# Altium PCB 3 Phase NPC Inverter.PcbDoc (part 2 of 2)
Units mm, origin at the board's own origin, x right, y up, seen from the top; angles counter-clockwise.
Board outline 302.85 x 157.72 mm, 6 copper layers (Top Layer, Reg_10_Pos, Pulse_Pos, Pulse_Neg, Reg_10_GND, Bottom Layer), stack 0.816 mm thick; 134 components, 89 nets, 487 pads, 1180 vias.
Unrouted connection lines stored in the file: 6.
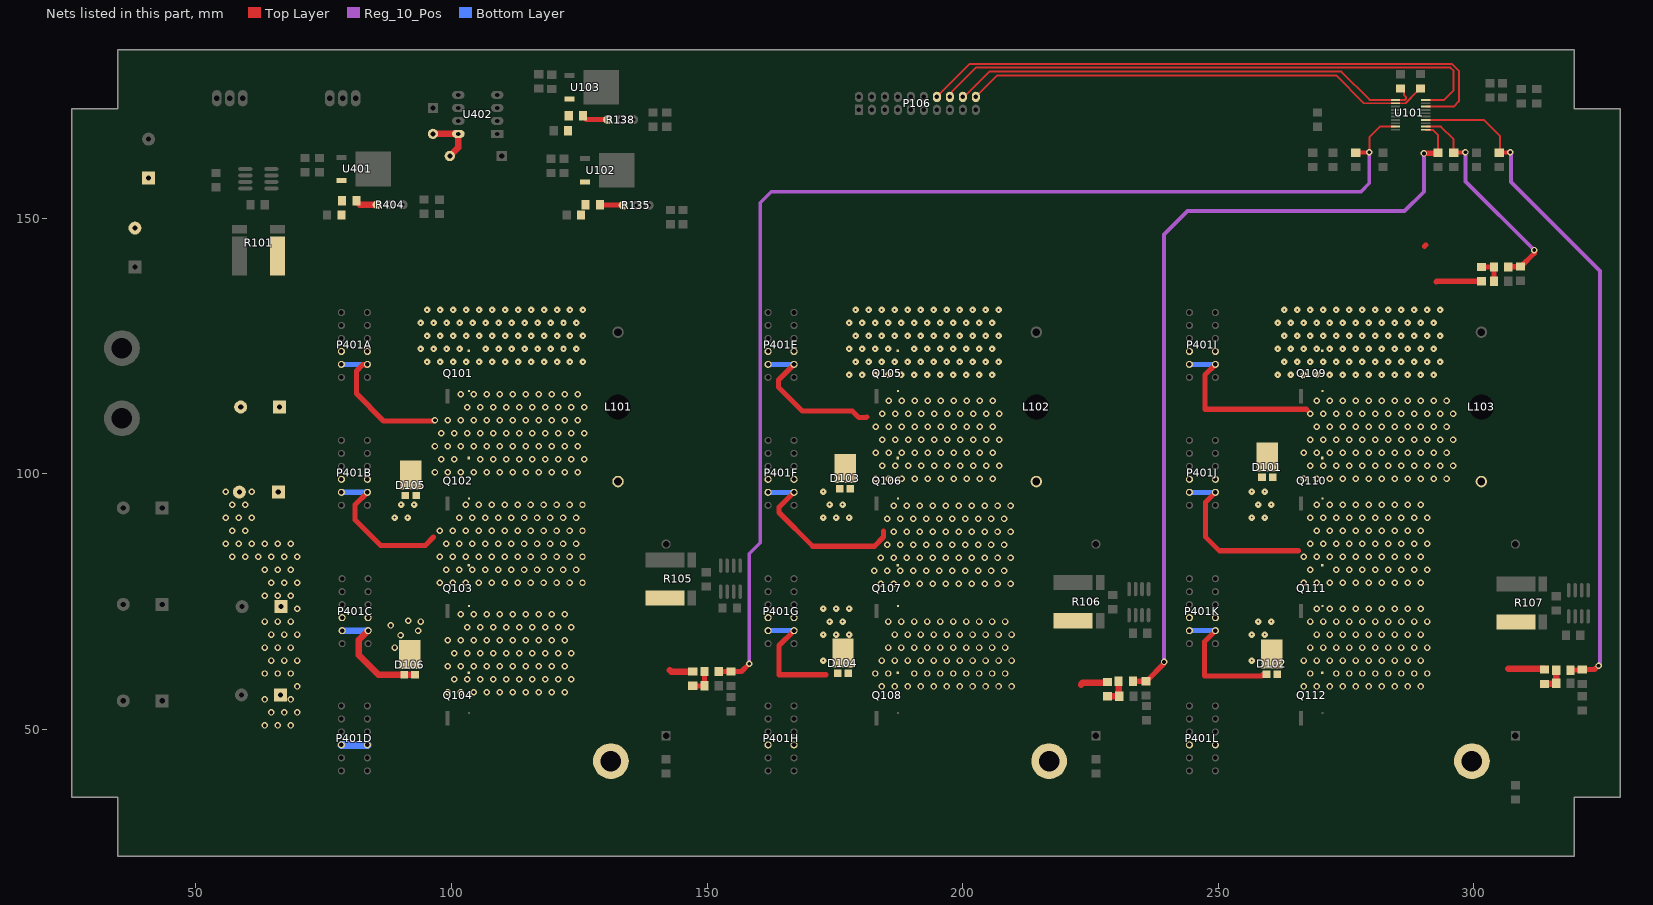
[diagram p6: the nets of this part, all layers, seen from the top]

## Via types
v1: diameter 1.27, hole 0.711, Top Layer to Bottom Layer, 888 vias
v2: diameter 1.27, hole 0.381, Top Layer to Bottom Layer, 258 vias
v3: diameter 1.27, hole 0.762, Top Layer to Bottom Layer, 30 vias
v4: diameter 5, hole 3, Top Layer to Bottom Layer, 4 vias

## Nets (pads, with @x,y where several pads share a name; then routed paths per layer and width w, separated by ;. In a path a pad name is that pad's centre, name@x,y a point inside that pad or via, vN(x,y) a via of type N, cw(c..) or ccw(c..) an arc to the next point about the centre after c; other vN are vias at no path point) (continued)
NetC129_1: C129.1 C130.1 Q101.3 Q105.3 Q109.3 R101.4 R102.2 | length 9.3
  Top Layer w1.016: 290.322,144.526 290.576,144.78 ; 292.608,137.541 292.735,137.668 R102.2@301.498,137.668
  other v2: 177.8,119.38 180.34,119.38 182.88,119.38 185.42,119.38 187.96,119.38 190.5,119.38 193.04,119.38 195.58,119.38 198.12,119.38 200.66,119.38 203.2,119.38 205.74,119.38 261.62,119.38 264.16,119.38 266.7,119.38 269.24,119.38 271.78,119.38 274.32,119.38 276.86,119.38 279.4,119.38 281.94,119.38 284.48,119.38 287.02,119.38 289.56,119.38 292.1,119.38 95.25,121.92 97.79,121.92 100.33,121.92 102.87,121.92 105.41,121.92 107.95,121.92 110.49,121.92 113.03,121.92 115.57,121.92 118.11,121.92 120.65,121.92 123.19,121.92 125.73,121.92 179.07,121.92 181.61,121.92 184.15,121.92 186.69,121.92 189.23,121.92 191.77,121.92 194.31,121.92 196.85,121.92 199.39,121.92 201.93,121.92 204.47,121.92 207.01,121.92 262.89,121.92 265.43,121.92 267.97,121.92 270.51,121.92 273.05,121.92 275.59,121.92 278.13,121.92 280.67,121.92 283.21,121.92 285.75,121.92 288.29,121.92 290.83,121.92 293.37,121.92 93.98,124.46 96.52,124.46 99.06,124.46 101.6,124.46 106.68,124.46 109.22,124.46 111.76,124.46 114.3,124.46 116.84,124.46 119.38,124.46 121.92,124.46 124.46,124.46 177.8,124.46 180.34,124.46 182.88,124.46 185.42,124.46 190.5,124.46 193.04,124.46 195.58,124.46 198.12,124.46 200.66,124.46 203.2,124.46 205.74,124.46 261.62,124.46 264.16,124.46 266.7,124.46 269.24,124.46 271.78,124.46 274.32,124.46 276.86,124.46 279.4,124.46 281.94,124.46 284.48,124.46 287.02,124.46 289.56,124.46 292.1,124.46 95.25,127 97.79,127 100.33,127 102.87,127 105.41,127 107.95,127 110.49,127 113.03,127 115.57,127 118.11,127 120.65,127 123.19,127 125.73,127 179.07,127 181.61,127 184.15,127 186.69,127 189.23,127 191.77,127 194.31,127 196.85,127 199.39,127 201.93,127 204.47,127 207.01,127 262.89,127 265.43,127 267.97,127 270.51,127 273.05,127 275.59,127 278.13,127 280.67,127 283.21,127 285.75,127 288.29,127 290.83,127 293.37,127 93.98,129.54 96.52,129.54 99.06,129.54 101.6,129.54 104.14,129.54 106.68,129.54 109.22,129.54 111.76,129.54 114.3,129.54 116.84,129.54 119.38,129.54 121.92,129.54 124.46,129.54 177.8,129.54 180.34,129.54 182.88,129.54 185.42,129.54 187.96,129.54 190.5,129.54 193.04,129.54 195.58,129.54 198.12,129.54 200.66,129.54 203.2,129.54 205.74,129.54 261.62,129.54 264.16,129.54 266.7,129.54 269.24,129.54 271.78,129.54 274.32,129.54 276.86,129.54 279.4,129.54 281.94,129.54 284.48,129.54 287.02,129.54 289.56,129.54 292.1,129.54 95.25,132.08 97.79,132.08 100.33,132.08 102.87,132.08 105.41,132.08 107.95,132.08 110.49,132.08 113.03,132.08 115.57,132.08 118.11,132.08 120.65,132.08 123.19,132.08 125.73,132.08 179.07,132.08 181.61,132.08 184.15,132.08 186.69,132.08 189.23,132.08 191.77,132.08 194.31,132.08 196.85,132.08 199.39,132.08 201.93,132.08 204.47,132.08 207.01,132.08 262.89,132.08 265.43,132.08 267.97,132.08 270.51,132.08 273.05,132.08 275.59,132.08 278.13,132.08 280.67,132.08 283.21,132.08 285.75,132.08 288.29,132.08 290.83,132.08 293.37,132.08
NetC129_2: C129.2 C130.2 C131.1 C132.1 D101.1 D101.2 D102.3 D103.1 D103.2 D104.3 D105.1 D105.2 D106.3
  other v1: 63.5,50.8 63.5,50.8 63.5,50.8 63.5,50.8 66.04,50.8 66.04,50.8 66.04,50.8 66.04,50.8 68.58,50.8 68.58,50.8 68.58,50.8 68.58,50.8 64.77,53.34 64.77,53.34 64.77,53.34 64.77,53.34 67.31,53.34 67.31,53.34 67.31,53.34 67.31,53.34 69.85,53.34 69.85,53.34 69.85,53.34 69.85,53.34 63.5,55.88 63.5,55.88 63.5,55.88 63.5,55.88 68.58,55.88 68.58,55.88 68.58,55.88 68.58,55.88 69.85,58.42 69.85,58.42 69.85,58.42 69.85,58.42 63.5,60.96 63.5,60.96 63.5,60.96 63.5,60.96 66.04,60.96 66.04,60.96 66.04,60.96 66.04,60.96 68.58,60.96 68.58,60.96 68.58,60.96 68.58,60.96 64.77,63.5 64.77,63.5 64.77,63.5 64.77,63.5 67.31,63.5 67.31,63.5 67.31,63.5 67.31,63.5 69.85,63.5 69.85,63.5 69.85,63.5 69.85,63.5 63.5,66.04 63.5,66.04 63.5,66.04 63.5,66.04 66.04,66.04 66.04,66.04 66.04,66.04 66.04,66.04 68.58,66.04 68.58,66.04 68.58,66.04 68.58,66.04 88.9,66.04 88.9,66.04 88.9,66.04 88.9,66.04 90.045,68.455 90.045,68.455 90.045,68.455 90.045,68.455 64.77,68.58 64.77,68.58 64.77,68.58 64.77,68.58 67.31,68.58 67.31,68.58 67.31,68.58 67.31,68.58 69.85,68.58 69.85,68.58 69.85,68.58 69.85,68.58 93.47,69.34 93.47,69.34 93.47,69.34 93.47,69.34 88.14,70.36 88.14,70.36 88.14,70.36 88.14,70.36 63.5,71.12 63.5,71.12 63.5,71.12 63.5,71.12 66.04,71.12 66.04,71.12 66.04,71.12 66.04,71.12 68.58,71.12 68.58,71.12 68.58,71.12 68.58,71.12 93.98,71.12 93.98,71.12 93.98,71.12 91.565,71.245 91.565,71.245 91.565,71.245 91.565,71.245 69.85,73.66 69.85,73.66 69.85,73.66 69.85,73.66 63.5,76.2 63.5,76.2 63.5,76.2 63.5,76.2 66.04,76.2 66.04,76.2 66.04,76.2 66.04,76.2 68.58,76.2 68.58,76.2 68.58,76.2 68.58,76.2 64.77,78.74 64.77,78.74 64.77,78.74 64.77,78.74 67.31,78.74 67.31,78.74 67.31,78.74 67.31,78.74 69.85,78.74 69.85,78.74 69.85,78.74 69.85,78.74 63.5,81.28 63.5,81.28 63.5,81.28 63.5,81.28 66.04,81.28 66.04,81.28 66.04,81.28 66.04,81.28 68.58,81.28 68.58,81.28 68.58,81.28 68.58,81.28 57.15,83.82 57.15,83.82 57.15,83.82 57.15,83.82 59.69,83.82 59.69,83.82 59.69,83.82 59.69,83.82 62.23,83.82 62.23,83.82 62.23,83.82 62.23,83.82 64.77,83.82 64.77,83.82 64.77,83.82 64.77,83.82 67.31,83.82 67.31,83.82 67.31,83.82 67.31,83.82 69.85,83.82 69.85,83.82 69.85,83.82 69.85,83.82 55.88,86.36 55.88,86.36 55.88,86.36 55.88,86.36 58.42,86.36 58.42,86.36 58.42,86.36 58.42,86.36 60.96,86.36 60.96,86.36 60.96,86.36 60.96,86.36 63.5,86.36 63.5,86.36 63.5,86.36 63.5,86.36 66.04,86.36 66.04,86.36 66.04,86.36 66.04,86.36 68.58,86.36 68.58,86.36 68.58,86.36 68.58,86.36 57.15,88.9 57.15,88.9 57.15,88.9 57.15,88.9 59.69,88.9 59.69,88.9 59.69,88.9 59.69,88.9 55.88,91.44 55.88,91.44 55.88,91.44 55.88,91.44 58.42,91.44 58.42,91.44 58.42,91.44 58.42,91.44 60.96,91.44 60.96,91.44 60.96,91.44 60.96,91.44 57.15,93.98 57.15,93.98 57.15,93.98 57.15,93.98 59.69,93.98 59.69,93.98 59.69,93.98 59.69,93.98 55.88,96.52 55.88,96.52 55.88,96.52 55.88,96.52 60.96,96.52 60.96,96.52 60.96,96.52 60.96,96.52
  other v2: 172.72,63.5 256.54,63.5 172.72,68.58 175.26,68.58 177.8,68.58 256.54,68.58 259.08,68.58 173.99,71.12 176.53,71.12 257.81,71.12 260.35,71.12 172.72,73.66 175.26,73.66 177.8,73.66 88.9,91.44 91.44,91.44 172.72,91.44 175.26,91.44 177.8,91.44 256.54,91.44 259.08,91.44 90.17,93.98 92.71,93.98 173.99,93.98 176.53,93.98 257.81,93.98 260.35,93.98 172.72,96.52 256.54,96.52 259.08,96.52
NetC405_2: C405.2 D401.K U402.8 | length 10
  Top Layer w1.27: C405.2@96.393,166.497 U402.8@101.346,166.497 101.346,163.83 D401.K@99.695,162.179
NetC406_2: C406.2 C407.1 P401A.3 P401B.3 P401C.3 P401D.3 P401E.3 P401F.3 P401G.3 P401H.3 P401I.3 P401J.3 P401K.3 P401L.3 | length 5.1
  Bottom Layer w1.524: P401D.3@78.486,46.99 P401D.3@83.566,46.99
NetP103_1: P103.1 R105.4 R112.2 | length 4.7
  Top Layer w1.27: 142.748,61.595 142.996,61.347 R112.2@147.314,61.347
NetP104_1: P104.1 R106.4 R115.2 | length 5.5
  Top Layer w1.27: 223.139,58.801 223.52,59.182 228.346,59.182 R115.2@228.346,59.315
NetP105_1: P105.1 R107.4 R118.2 | length 7.2
  Top Layer w1.27: 306.705,61.849 313.696,61.849 R118.2@313.817,61.728
NetR102_1: R102.1 R103.2 R104.2 | length 5.2
  Top Layer w1.016: R102.1@301.498,140.468 301.501,140.465 303.902,140.465 303.908,140.459 303.908,137.671 R104.2@303.911,137.668
NetR112_1: R112.1 R113.2 R114.2 | length 5.1
  Top Layer w1: R112.1@147.192,58.547 R113.2@149.478,58.547 R114.2@149.478,61.341
NetR115_1: R115.1 R116.2 R117.2 | length 5.3
  Top Layer w1.27: R115.1@228.346,56.515 R116.2@230.626,56.515 230.563,56.578 230.563,59.372 R117.2@230.499,59.436
NetR118_1: R118.1 R119.2 R120.2 | length 4.9
  Top Layer w1.27: R118.1@313.817,58.928 313.88,58.991 316.034,58.991 R119.2@316.097,59.055 R120.2@316.097,61.595
NetR133_2: R133.2 R134.2 U102.3
NetR134_1: R134.1 R135.1 | length 4.6
  Top Layer w1: R134.1@129.032,152.654 129.095,152.59 133.413,152.59 133.477,152.527 R135.1@133.604,152.527
NetR136_2: R136.2 R137.2 U103.3
NetR137_1: R137.1 R138.1 | length 5.2
  Top Layer w1: R137.1@125.736,170.053 125.736,169.953 126.398,169.291 R138.1@130.556,169.291
NetR402_2: R402.2 R403.2 U401.3
NetR403_1: R403.1 R404.1 | length 4.4
  Top Layer w1.27: R403.1@81.407,153.416 81.407,153.316 82.069,152.654 R404.1@85.471,152.654
SPI2(ADC)-MISO: P106.14 U101.18 | length 118.6
  Top Layer w0.381: P106.14@194.668,173.459 201.422,180.213 295.656,180.213 297.053,178.816 297.053,172.847 296.052,171.846 U101.18@290.576,171.846
SPI2(ADC)-MOSI: P106.20 R132.1 U101.2 | length 92.2
  Top Layer w0.381: P106.20@202.565,173.736 206.756,177.927 273.05,177.927 278.481,172.496 U101.2@284.683,172.496 286.607,172.496 288.85,174.739 288.85,174.777 289.46,175.387 R132.1@289.56,175.387
SPI2(ADC)-NCS: P106.18 R131.1 U101.1@284.683,173.146 | length 93.8
  Top Layer w0.381: P106.18@199.884,173.369 205.204,178.689 274.066,178.689 279.609,173.146 U101.1@284.683,173.146 286.467,173.146 286.69,173.369 286.69,173.75 286.333,174.108 286.333,174.65 285.723,175.26 R131.1@285.623,175.26
SPI2(ADC)-SCK: P106.16 U101.20 | length 111.6
  Top Layer w0.381: P106.16@197.485,173.736 197.485,174.288 197.862,174.664 197.862,174.748 202.565,179.451 295.402,179.451 296.037,178.816 296.037,175.006 294.177,173.146 U101.20@290.576,173.146
VS1: D105.3 P401A.2 Q101.2 Q102.3 | length 29.3
  Top Layer w1.016: P401A.2@83.566,121.412 83.493,121.339 82.604,121.339 81.407,120.142 81.407,115.697 86.741,110.363 v1@96.266,110.363
  Bottom Layer w1.016: P401A.2@78.486,121.412 P401A.2@83.566,121.412
  other v1: 96.774,100.33 99.314,100.33 101.854,100.33 104.394,100.33 106.934,100.33 109.474,100.33 112.014,100.33 114.554,100.33 117.094,100.33 119.634,100.33 122.174,100.33 124.714,100.33 98.044,102.87 100.584,102.87 105.664,102.87 108.204,102.87 110.744,102.87 113.284,102.87 115.824,102.87 118.364,102.87 120.904,102.87 123.444,102.87 125.984,102.87 96.774,105.41 99.314,105.41 101.854,105.41 104.394,105.41 106.934,105.41 109.474,105.41 112.014,105.41 114.554,105.41 117.094,105.41 119.634,105.41 122.174,105.41 124.714,105.41 98.044,107.95 100.584,107.95 103.124,107.95 105.664,107.95 108.204,107.95 110.744,107.95 113.284,107.95 115.824,107.95 118.364,107.95 120.904,107.95 123.444,107.95 125.984,107.95 96.774,110.49 99.314,110.49 101.854,110.49 104.394,110.49 106.934,110.49 109.474,110.49 112.014,110.49 114.554,110.49 117.094,110.49 119.634,110.49 122.174,110.49 124.714,110.49 103.124,113.03 105.664,113.03 108.204,113.03 110.744,113.03 113.284,113.03 115.824,113.03 118.364,113.03 120.904,113.03 123.444,113.03 125.984,113.03 101.854,115.57 104.394,115.57 106.934,115.57 109.474,115.57 112.014,115.57 114.554,115.57 117.094,115.57 119.634,115.57 122.174,115.57 124.714,115.57
VS2: L101.1 P401B.2 Q102.2 Q103.3 | length 29.6
  Top Layer w1.016: P401B.2@83.566,96.393 81.129,93.956 81.129,91.023 86.166,85.987 94.877,85.987 96.52,87.63
  Bottom Layer w1.016: P401B.2@78.486,96.393 P401B.2@83.566,96.393
  other v1: 97.696,78.707 100.236,78.707 102.776,78.707 105.316,78.707 107.856,78.707 110.396,78.707 112.936,78.707 115.476,78.707 118.016,78.707 120.556,78.707 123.096,78.707 125.636,78.707 98.966,81.247 101.506,81.247 104.046,81.247 106.586,81.247 109.126,81.247 111.666,81.247 114.206,81.247 116.746,81.247 119.286,81.247 121.826,81.247 124.366,81.247 97.696,83.787 100.236,83.787 102.776,83.787 105.316,83.787 107.856,83.787 110.396,83.787 112.936,83.787 115.476,83.787 118.016,83.787 120.556,83.787 123.096,83.787 125.636,83.787 98.966,86.327 101.506,86.327 104.046,86.327 106.586,86.327 109.126,86.327 111.666,86.327 114.206,86.327 116.746,86.327 119.286,86.327 121.826,86.327 124.366,86.327 97.696,88.867 100.236,88.867 102.776,88.867 105.316,88.867 107.856,88.867 110.396,88.867 112.936,88.867 115.476,88.867 118.016,88.867 120.556,88.867 123.096,88.867 125.636,88.867 101.506,91.407 104.046,91.407 106.586,91.407 109.126,91.407 111.666,91.407 114.206,91.407 116.746,91.407 119.286,91.407 121.826,91.407 124.366,91.407 102.776,93.947 105.316,93.947 107.856,93.947 110.396,93.947 112.936,93.947 115.476,93.947 118.016,93.947 120.556,93.947 123.096,93.947 125.636,93.947
VS3: D106.1 D106.2 P401C.2 Q103.2 Q104.3 | length 23.2
  Top Layer w1.27: P401C.2@83.693,69.342 81.915,67.564 81.915,64.516 85.725,60.706 92.075,60.706 92.088,60.719 D106.1@92.871,60.719
  Bottom Layer w1.27: P401C.2@78.613,69.342 P401C.2@83.693,69.342
  other v1: 99.314,57.324 101.854,57.324 104.394,57.324 106.934,57.324 109.474,57.324 112.014,57.324 114.554,57.324 117.094,57.324 119.634,57.324 122.174,57.324 100.584,59.864 103.124,59.864 105.664,59.864 108.204,59.864 110.744,59.864 113.284,59.864 115.824,59.864 118.364,59.864 120.904,59.864 123.444,59.864 99.314,62.404 101.854,62.404 104.394,62.404 106.934,62.404 109.474,62.404 112.014,62.404 114.554,62.404 117.094,62.404 119.634,62.404 122.174,62.404 100.584,64.944 103.124,64.944 105.664,64.944 108.204,64.944 110.744,64.944 113.284,64.944 115.824,64.944 118.364,64.944 120.904,64.944 123.444,64.944 99.314,67.484 101.854,67.484 104.394,67.484 106.934,67.484 109.474,67.484 112.014,67.484 114.554,67.484 117.094,67.484 119.634,67.484 122.174,67.484 103.124,70.024 105.664,70.024 108.204,70.024 110.744,70.024 113.284,70.024 115.824,70.024 118.364,70.024 120.904,70.024 123.444,70.024 101.854,72.564 104.394,72.564 106.934,72.564 109.474,72.564 112.014,72.564 114.554,72.564 117.094,72.564 119.634,72.564 122.174,72.564
VS5: D103.3 P401E.2 Q105.2 Q106.3 | length 30.6
  Top Layer w1: P401E.2@167.005,121.412 163.957,118.364 163.957,116.967 168.656,112.268 178.435,112.268 179.705,110.998 181.102,110.998 181.229,111.125
  Bottom Layer w1: P401E.2@161.925,121.412 P401E.2@167.005,121.412
  other v1: 183.007,99.064 185.547,99.064 188.087,99.064 190.627,99.064 193.167,99.064 195.707,99.064 198.247,99.064 200.787,99.064 203.327,99.064 205.867,99.064 184.277,101.604 186.817,101.604 189.357,101.604 191.897,101.604 194.437,101.604 196.977,101.604 199.517,101.604 202.057,101.604 204.597,101.604 207.137,101.604 183.007,104.144 185.547,104.144 188.087,104.144 190.627,104.144 193.167,104.144 195.707,104.144 198.247,104.144 200.787,104.144 203.327,104.144 205.867,104.144 184.277,106.684 186.817,106.684 189.357,106.684 191.897,106.684 194.437,106.684 196.977,106.684 199.517,106.684 202.057,106.684 204.597,106.684 207.137,106.684 183.007,109.224 185.547,109.224 188.087,109.224 190.627,109.224 193.167,109.224 195.707,109.224 198.247,109.224 200.787,109.224 203.327,109.224 205.867,109.224 184.277,111.764 186.817,111.764 189.357,111.764 191.897,111.764 194.437,111.764 196.977,111.764 199.517,111.764 202.057,111.764 204.597,111.764 207.137,111.764 185.547,114.304 188.087,114.304 190.627,114.304 193.167,114.304 195.707,114.304 198.247,114.304 200.787,114.304 203.327,114.304 205.867,114.304
VS6: L102.1 P401F.2 Q106.2 Q107.3 | length 35.3
  Top Layer w1: P401F.2@167.005,96.393 164.084,93.472 164.084,92.456 170.68,85.86 182.733,85.86 184.531,87.658 184.531,88.773
  Bottom Layer w1: P401F.2@161.925,96.393 P401F.2@167.005,96.393
  other v1: 183.958,78.548 186.498,78.548 189.038,78.548 191.578,78.548 194.118,78.548 196.658,78.548 199.198,78.548 201.738,78.548 204.278,78.548 206.818,78.548 209.358,78.548 182.688,81.088 185.228,81.088 187.768,81.088 190.308,81.088 192.848,81.088 195.388,81.088 197.928,81.088 200.468,81.088 203.008,81.088 205.548,81.088 208.088,81.088 183.958,83.628 186.498,83.628 189.038,83.628 191.578,83.628 194.118,83.628 196.658,83.628 199.198,83.628 201.738,83.628 204.278,83.628 206.818,83.628 209.358,83.628 185.228,86.168 187.768,86.168 190.308,86.168 192.848,86.168 195.388,86.168 197.928,86.168 200.468,86.168 203.008,86.168 205.548,86.168 208.088,86.168 186.498,88.708 189.038,88.708 191.578,88.708 194.118,88.708 196.658,88.708 199.198,88.708 201.738,88.708 204.278,88.708 206.818,88.708 209.358,88.708 185.228,91.248 187.768,91.248 190.308,91.248 192.848,91.248 195.388,91.248 197.928,91.248 200.468,91.248 203.008,91.248 205.548,91.248 208.088,91.248 186.498,93.788 189.038,93.788 191.578,93.788 194.118,93.788 196.658,93.788 199.198,93.788 201.738,93.788 204.278,93.788 206.818,93.788 209.358,93.788
VS7: D104.1 D104.2 P401G.2 Q107.2 Q108.3 | length 24.1
  Top Layer w1: P401G.2@167.005,69.342 164.084,66.421 164.084,60.706 173.228,60.706
  Bottom Layer w1: P401G.2@161.925,69.342 P401G.2@167.005,69.342
  other v1: 184.15,58.42 186.69,58.42 189.23,58.42 191.77,58.42 194.31,58.42 196.85,58.42 199.39,58.42 201.93,58.42 204.47,58.42 207.01,58.42 209.55,58.42 182.88,60.96 185.42,60.96 190.5,60.96 193.04,60.96 195.58,60.96 198.12,60.96 200.66,60.96 203.2,60.96 205.74,60.96 208.28,60.96 184.15,63.5 186.69,63.5 189.23,63.5 191.77,63.5 194.31,63.5 196.85,63.5 199.39,63.5 201.93,63.5 204.47,63.5 207.01,63.5 209.55,63.5 185.42,66.04 187.96,66.04 190.5,66.04 193.04,66.04 195.58,66.04 198.12,66.04 200.66,66.04 203.2,66.04 205.74,66.04 208.28,66.04 186.69,68.58 189.23,68.58 191.77,68.58 194.31,68.58 196.85,68.58 199.39,68.58 201.93,68.58 204.47,68.58 207.01,68.58 209.55,68.58 185.42,71.12 187.96,71.12 190.5,71.12 193.04,71.12 195.58,71.12 198.12,71.12 200.66,71.12 203.2,71.12 205.74,71.12 208.28,71.12
VS9: D101.3 P401I.2 Q109.2 Q110.3 | length 34.7
  Top Layer w1: P401I.2@249.428,121.412 247.396,119.38 247.396,112.649 267.208,112.649 267.335,112.522
  Bottom Layer w1.016: P401I.2@244.348,121.412 P401I.2@249.428,121.412
  other v1: 266.7,99.06 269.24,99.06 271.78,99.06 274.32,99.06 276.86,99.06 279.4,99.06 281.94,99.06 284.48,99.06 287.02,99.06 289.56,99.06 292.1,99.06 294.64,99.06 267.97,101.6 270.51,101.6 273.05,101.6 275.59,101.6 278.13,101.6 280.67,101.6 283.21,101.6 285.75,101.6 288.29,101.6 290.83,101.6 293.37,101.6 295.91,101.6 266.7,104.14 269.24,104.14 271.78,104.14 274.32,104.14 276.86,104.14 279.4,104.14 281.94,104.14 284.48,104.14 287.02,104.14 289.56,104.14 292.1,104.14 294.64,104.14 267.97,106.68 270.51,106.68 273.05,106.68 275.59,106.68 278.13,106.68 280.67,106.68 283.21,106.68 285.75,106.68 288.29,106.68 290.83,106.68 293.37,106.68 295.91,106.68 269.24,109.22 271.78,109.22 274.32,109.22 276.86,109.22 279.4,109.22 281.94,109.22 284.48,109.22 287.02,109.22 289.56,109.22 292.1,109.22 294.64,109.22 267.97,111.76 270.51,111.76 273.05,111.76 275.59,111.76 278.13,111.76 280.67,111.76 283.21,111.76 285.75,111.76 288.29,111.76 290.83,111.76 293.37,111.76 295.91,111.76 269.24,114.3 271.78,114.3 274.32,114.3 276.86,114.3 279.4,114.3 281.94,114.3 284.48,114.3 287.02,114.3 289.56,114.3 292.1,114.3 294.64,114.3
VS10: L103.1 P401J.2 Q110.2 Q111.3 | length 33.9
  Top Layer w1: P401J.2@249.428,96.393 247.523,94.488 247.523,87.63 250.19,84.963 265.684,84.963
  Bottom Layer w1: P401J.2@244.348,96.393 P401J.2@249.428,96.393
  other v1: 266.7,78.74 269.24,78.74 271.78,78.74 274.32,78.74 276.86,78.74 279.4,78.74 281.94,78.74 284.48,78.74 287.02,78.74 289.56,78.74 267.97,81.28 273.05,81.28 275.59,81.28 278.13,81.28 280.67,81.28 283.21,81.28 285.75,81.28 288.29,81.28 290.83,81.28 266.7,83.82 269.24,83.82 271.78,83.82 274.32,83.82 276.86,83.82 279.4,83.82 281.94,83.82 284.48,83.82 287.02,83.82 289.56,83.82 267.97,86.36 270.51,86.36 273.05,86.36 275.59,86.36 278.13,86.36 280.67,86.36 283.21,86.36 285.75,86.36 288.29,86.36 290.83,86.36 269.24,88.9 271.78,88.9 274.32,88.9 276.86,88.9 279.4,88.9 281.94,88.9 284.48,88.9 287.02,88.9 289.56,88.9 267.97,91.44 270.51,91.44 273.05,91.44 275.59,91.44 278.13,91.44 280.67,91.44 283.21,91.44 285.75,91.44 288.29,91.44 290.83,91.44 269.24,93.98 271.78,93.98 274.32,93.98 276.86,93.98 279.4,93.98 281.94,93.98 284.48,93.98 287.02,93.98 289.56,93.98
VS11: D102.1 D102.2 P401K.2 Q111.2 Q112.3 | length 26.4
  Top Layer w1: P401K.2@249.428,69.342 247.269,67.183 247.269,60.452 258.398,60.452 258.665,60.719
  Bottom Layer w1: P401K.2@244.348,69.342 P401K.2@249.428,69.342
  other v1: 266.7,58.42 269.24,58.42 271.78,58.42 274.32,58.42 276.86,58.42 279.4,58.42 281.94,58.42 284.48,58.42 287.02,58.42 289.56,58.42 267.97,60.96 273.05,60.96 275.59,60.96 278.13,60.96 280.67,60.96 283.21,60.96 285.75,60.96 288.29,60.96 290.83,60.96 266.7,63.5 269.24,63.5 271.78,63.5 274.32,63.5 276.86,63.5 279.4,63.5 281.94,63.5 284.48,63.5 287.02,63.5 289.56,63.5 267.97,66.04 270.51,66.04 273.05,66.04 275.59,66.04 278.13,66.04 280.67,66.04 283.21,66.04 285.75,66.04 288.29,66.04 290.83,66.04 269.24,68.58 271.78,68.58 274.32,68.58 276.86,68.58 279.4,68.58 281.94,68.58 284.48,68.58 287.02,68.58 289.56,68.58 267.97,71.12 270.51,71.12 273.05,71.12 275.59,71.12 278.13,71.12 280.67,71.12 283.21,71.12 285.75,71.12 288.29,71.12 290.83,71.12 269.24,73.66 271.78,73.66 274.32,73.66 276.86,73.66 279.4,73.66 281.94,73.66 284.48,73.66 287.02,73.66 289.56,73.66
VS+1: C104.2 R103.1 R124.2 U101.12 | length 42.4
  Top Layer w0.381: U101.12@290.576,167.946 293.527,167.946 296.037,165.436 R124.2@296.037,162.814
  Top Layer w0.762: R124.2@296.037,162.814 296.082,162.859 298.278,162.859 v3(298.323,162.904)
  Top Layer w1.016: R103.1@306.705,140.462 306.768,140.525 309.054,140.525 C104.2@309.118,140.589 ; C104.2@308.991,140.589 C104.2@309.118,140.589 ; v3(311.785,143.764) 311.785,143.156 309.218,140.589 C104.2@309.118,140.589
  Reg_10_Pos w0.762: 298.323,162.249 298.323,157.226 v3(311.785,143.764)
VS+2: C108.2 R114.1 R126.2 U101.9 | length 235.9
  Top Layer w0.381: v3(279.527,162.904) 279.527,165.862 281.611,167.946 U101.9@284.683,167.946
  Top Layer w0.762: R126.2@276.86,162.814 276.905,162.859 279.482,162.859 v3(279.527,162.904)
  Top Layer w1.016: R114.1@152.278,61.341 C108.2@154.685,61.341 156.718,61.341 v3(158.242,62.865)
  Reg_10_Pos w0.762: v3(158.242,62.865) 158.242,84.384 160.401,86.543 160.401,153.035 162.56,155.194 277.876,155.194 279.527,156.845 v3@279.527,162.687
VS+3: C109.2 R117.1 R123.2 U101.11 | length 161.8
  Top Layer w0.381: U101.11@290.576,167.296 291.936,167.296 292.989,166.243 R123.2@292.989,162.814
  Top Layer w0.508: R117.1@233.299,59.436 R117.1@233.426,59.436
  Top Layer w1.016: R117.1@233.426,59.436 233.429,59.439 235.836,59.439 C109.2@235.839,59.442 235.939,59.442 239.395,62.898 v3(239.395,63.246) ; v3(290.195,162.687) 290.244,162.736 R123.2@292.784,162.736
  Reg_10_Pos w0.762: v3(239.395,63.246) 239.395,146.812 243.967,151.384 286.385,151.384 290.195,155.194 v3@290.195,162.404
VS+4: C110.2 R120.1 R128.2 U101.14 | length 134.2
  Top Layer w0.381: U101.14@290.576,169.246 301.924,169.246 305.054,166.116 305.054,162.941 R128.2@304.972,162.859
  Top Layer w0.762: R128.2@304.927,162.814 304.972,162.859 307.041,162.859 v3(307.086,162.904)
  Top Layer w1.016: R120.1@318.897,61.595 318.963,61.661 321.117,61.661 C110.2@321.183,61.728 323.602,61.728 v3(324.358,62.484)
  Reg_10_Pos w0.762: v3@307.213,162.306 307.213,157.099 324.612,139.7 324.612,62.875 324.358,62.621 v3(324.358,62.484)
pads on no net: L101.3 L102.3 L103.3 U101.1@284.048,174.031
copper on no net:
  other v4: 324.612,40.767 30.353,41.021 324.104,166.878 29.972,167.513

## Polygon pours and split planes (outlines as drawn)
VS1 on Top Layer "VS1_L01_P023" (solid, pour order 23): 89.916,102.705 89.916,97.026 94.101,97.079 94.101,97.536 101.219,97.536 101.219,102.362 101.69,102.833
NetC106_2 on Top Layer "Netc106_2" (solid, pour order 39): 211.938,130.62 211.938,119.635 232.791,119.635 232.791,83.694 225.626,83.694 225.626,75.566 217.551,75.566 217.551,85.853 218.059,85.853 218.059,119.635 232.791,119.635 232.791,130.498
VS10 on Top Layer "VS10" (solid, pour order 67): 298.704,102.87 298.704,96.266 290.957,96.266 290.957,89.789 305.435,89.789 305.435,102.87
NetC107_2 on Top Layer "107_2" (solid, pour order 62): 298.704,131.699 298.704,119.888 318.897,119.888 318.897,83.439 312.166,83.439 312.166,76.708 303.403,76.708 303.403,87.884 305.943,87.884 305.943,105.537 310.769,105.537 310.769,119.888 318.897,119.888 318.897,131.699
NetC129_2 on Top Layer "129_2" (solid, pour order 59): 253.746,74.422 253.746,61.849 262.636,61.849 262.832,74.422
VS11 on Top Layer "VS11" (solid, pour order 57): 264.541,55.499 257.556,55.499 257.556,61.595 264.541,61.595
NetC129_2 on Top Layer "129_2" (solid, pour order 50): 170.688,75.057 170.688,61.976 179.197,61.976 179.197,75.057
NetC129_2 on Top Layer "129_2" (solid, pour order 49): 253.746,100.076 253.746,88.773 262.509,88.773 262.509,100.076
VS9 on Top Layer "VS9" (solid, pour order 48): 256.667,106.172 256.667,100.584 265.176,100.584 265.176,106.172
VS6 on Top Layer "VS6" (solid, pour order 45): 209.296,100.686 209.296,89.027 217.043,89.027 217.043,100.686
VS7 on Top Layer "VS7" (solid, pour order 43): 181.356,55.245 181.356,61.722 172.974,61.722 172.974,55.245
VS6 on Top Layer "VS6_L01_P034" (solid, pour order 34): 183.769,95.941 183.769,85.979 181.61,85.979 181.61,75.438 215.646,75.438 215.646,96.09
NetC129_2 on Top Layer "NETC129_2_L01_P032" (solid, pour order 32): 170.561,89.535 179.324,89.535 179.324,97.79 179.197,97.917 170.561,97.917
VS5 on Top Layer "VS5_L01_P031" (solid, pour order 31): 174.752,103.759 174.625,103.632 174.625,98.298 181.356,98.298 181.356,103.759
+12 on Top Layer "NONET_L-01_P-001" (solid, pour order 70): 128.778,165.862 128.778,155.067 135.128,155.067 135.255,154.94 135.255,150.622 140.716,150.622 313.436,150.622 313.436,173.228 308.209,173.228 308.209,155.667 147.955,155.667 147.955,165.862 142.748,165.862
NetP105_1 on Top Layer "105_1" (solid, pour order 65): 298.831,72.644 312.039,72.644 312.039,69.596 312.039,53.096 305.562,53.096 305.562,39.243 305.308,38.989 294.513,38.989 294.513,72.644 298.831,72.644 312.039,72.644
NetR402_2 on Top Layer "NONET_L-01_P-001" (solid, pour order 82): 77.47,158.115 77.47,149.733 80.137,149.733 80.137,158.115
NetC129_1 on Top Layer "NETC129_1_L01_P001" (solid, pour order 1): 63.017,147.142 294.665,147.142 294.665,118.694 260.883,118.694 260.375,118.694 260.375,119.964 260.375,135.585 208.051,135.585 208.051,119.075 175.92,119.075 175.92,134.188 126.771,134.188 126.771,119.456 91.338,119.456 91.338,134.95 63.525,134.95 63.017,135.458
NetC129_2 on Top Layer "NETC129_2_L01_P021" (solid, pour order 21): 87.417,73.152 94.996,73.152 94.996,62.103 87.503,62.103 87.376,61.976
NetC105_2 on Top Layer "NETC105_2_L01_P016" (solid, pour order 16): 128.397,130.556 128.397,118.999 140.716,118.999 140.843,118.872 140.843,89.281 137.287,89.281 137.16,89.154 137.16,79.883 145.542,79.883 145.669,80.01 145.669,85.344 152.527,85.344 154.559,87.376 154.559,130.556
+10D on Top Layer "NONET_L-01_P-001" (solid, pour order 73): 81.153,163.703 81.153,155.194 86.868,155.194 86.995,155.067 86.995,150.749 92.456,150.749 92.456,152.273 111.379,152.273 111.379,152.654 111.379,167.64 105.918,167.64 105.918,160.401 106.045,160.274 95.123,160.274 95.123,163.703
+48 on Top Layer "NONET_L-01_P-001" (solid, pour order 72): 47.066,161.417 47.066,170.815 55.626,170.815 55.626,174.371 57.658,174.371 57.658,163.521 79.502,163.521 79.502,161.417
NetR133_2 on Top Layer "NONET_L-01_P-001" (solid, pour order 71): 124.333,158.115 124.333,149.606 127.254,149.606 127.254,158.115
+10 on Top Layer "NONET_L-01_P-001" (solid, pour order 69): 125.603,181.864 125.603,171.831 131.572,171.831 131.699,171.704 131.699,167.386 131.826,167.259 138.049,167.259 138.049,169.799 143.51,169.799 143.51,181.864
NetR136_2 on Top Layer "NONET_L-01_P-001" (solid, pour order 68): 121.539,174.117 121.539,165.608 124.46,165.608 124.46,174.117
+48 on Top Layer "+48_L01_P000" (solid, pour order 0): 30.063,117.706 42.382,117.706 42.382,48.641 44.056,48.641 52.161,48.641 52.161,131.422 53.304,132.565 61.559,132.565 61.559,146.535 48.387,146.762 48.387,177.267 111.826,177.192 111.826,160.782 127.254,160.782 127.254,162.84 115.54,162.84 115.552,177.187 124.206,177.265 124.206,181.864 42.926,181.864 42.926,148.232 30.063,134.551 30.063,128.12
VS11 on Top Layer "VS11" (solid, pour order 55): 266.827,75.692 266.827,64.516 264.541,64.516 264.541,55.499 291.719,55.499 291.719,75.692 291.592,75.692
VS10 on Top Layer "VS10" (solid, pour order 53): 266.827,96.393 266.827,85.471 264.16,85.471 264.16,76.454 291.973,76.454 291.973,96.393
VS9 on Top Layer "Vs9" (solid, pour order 47): 266.7,116.967 266.7,106.553 264.795,106.553 264.795,97.409 297.815,97.409 297.814,97.41 297.814,116.825
NetP104_1 on Top Layer "Netc104_1" (solid, pour order 41): 225.679,52.07 221.869,52.07 221.869,40.005 221.996,39.878 221.869,39.751 211.836,39.751 211.836,64.037 217.678,73.025 225.679,73.025
VS7 on Top Layer "VS7" (solid, pour order 36): 183.769,74.676 183.769,64.516 181.356,64.516 181.356,55.245 211.074,55.245 211.074,74.676
NetC129_2 on Top Layer "NETC129_2_L01_P026" (solid, pour order 26): 94.869,96.52 87.122,96.52 87.122,88.519 91.059,88.519 94.869,92.329
VS3 on Top Layer "VS3_L01_P024" (solid, pour order 24): 89.916,61.468 89.916,55.372 100.33,55.372 100.457,55.499 100.457,61.595
NetP103_1 on Top Layer "NETP103_1_L01_P017" (solid, pour order 17): 145.669,77.724 137.668,77.724 137.541,77.597 137.668,77.47 137.668,72.39 127.508,72.39 127.508,40.132 137.414,40.132 137.414,54.356 145.601,54.356 145.669,57.192
VS2 on Top Layer "VS2_L01_P013" (solid, pour order 13): 128.524,104.902 128.524,91.059 128.778,90.805 138.811,90.805 138.811,104.902
VS2 on Top Layer "VS2_L01_P009" (solid, pour order 9): 99.949,95.884 99.949,90.297 95.758,90.297 95.758,76.835 136.144,76.835 136.144,96.054
VS5 on Top Layer "VS5_L01_P012" (solid, pour order 12): 183.896,117.221 183.769,117.094 183.769,112.649 180.34,112.649 180.34,97.409 208.534,97.409 208.534,117.094 200.533,117.094 200.533,116.84 200.787,117.094 210.058,117.094
VS3 on Top Layer "VS3_L01_P010" (solid, pour order 10): 100.076,74.93 100.076,69.977 96.012,69.977 96.012,55.372 125.095,55.372 125.222,55.499 125.222,75.184
VS1 on Top Layer "VS1_L01_P005" (solid, pour order 5): 99.949,111.887 95.504,111.887 95.504,97.536 127.127,97.536 127.127,117.348 99.949,117.348
GND on Top Layer "GND_L01_P004" (solid, pour order 4): 41.106,110.109 28.374,110.109 28.374,44.069 36.322,44.069 36.322,26.035 277.929,26.035 277.929,39.497 277.929,54.102 267.261,54.102 267.261,39.243 193.474,39.243 193.22,39.497 193.22,54.229 184.076,54.229 183.949,54.102 183.949,38.989 108.765,38.989 108.765,53.848 100.129,53.848 100.002,53.721 100.002,38.735 72.697,38.735 72.443,38.989 72.443,47.296 60.831,47.386 61.075,77.662 55.055,77.662 55.055,47.296 40.641,47.296
NetC129_2 on Top Layer "NETC129_2_L01_P003" (solid, pour order 3): 62.103,121.412 53.975,121.412 53.975,80.645 61.722,80.645 61.722,48.133 71.755,48.133 71.755,48.514 71.755,49.149 71.755,87.376 62.357,87.376 62.23,87.503
NetC129_1 on Top Layer "NETC129_1_L01_P002" (solid, pour order 2): 63.246,134.874 63.119,134.747 63.119,88.519 72.644,88.519 72.771,88.519 72.771,135.001
NetC129_2 on Bottom Layer "NETC129_2_L06_P025" (solid, pour order 25): 171.141,106.008 171.141,37.428 170.252,36.539 73.605,36.539 73.605,26.633 73.478,26.506 262.962,26.506 262.962,32.645 262.958,32.645 262.962,108.802 262.454,109.31 262.073,108.929 254.199,108.929 254.199,37.428 179.777,37.428 179.777,105.627 179.396,106.008
VS5 on Bottom Layer "VS5_L06_P030" (solid, pour order 30): 183.896,117.221 183.769,117.094 183.769,112.649 204.089,112.649 208.534,117.094 208.534,97.536 180.467,97.536 180.34,97.409 180.34,112.649 204.089,112.649 208.534,117.094
VS6 on Bottom Layer "VS6" (solid, pour order 35): 183.896,95.631 183.896,85.725 183.769,85.598 181.61,85.598 181.61,75.438 210.947,75.438 210.947,95.758
NetC129_1 on Bottom Layer "NETC129_1_L06_P029" (solid, pour order 29): 176.149,133.604 176.149,118.491 208.28,118.491 208.28,133.477
+10 on Bottom Layer "NONET_L-01_P-001" (solid, pour order 79): 143.51,169.799 143.51,182.245 125.603,182.245 125.603,171.831 131.826,171.831 131.826,167.386 131.953,167.259 138.049,167.259 137.922,167.386 137.922,169.799 141.224,169.799
GND on Bottom Layer "NONET_L-01_P-001" (solid, pour order 76): 35.56,118.11 35.56,110.998 35.56,110.871 35.433,110.998 28.448,110.998 28.448,161.326 37.465,167.93 37.465,181.102 124.46,181.102 124.46,173.577 110.363,173.239 110.363,173.2 107.5,173.123 107.5,176.063 77.202,176.022 77.202,146.812 72.263,146.812 72.263,176.06 48.514,176.022 45.339,172.847 45.339,161.29 34.163,161.29 31.496,158.623 31.496,121.031
VS11 on Bottom Layer "VS11" (solid, pour order 56): 266.827,75.692 266.827,64.516 264.541,64.516 264.541,55.499 291.719,55.499 291.719,75.692
VS10 on Bottom Layer "VS10" (solid, pour order 54): 266.827,96.393 266.827,85.471 264.16,85.471 264.16,76.454 291.973,76.454 291.973,96.393
VS9 on Bottom Layer "VS9" (solid, pour order 52): 266.7,116.968 266.7,106.553 264.795,106.553 264.795,97.409 297.815,97.409 297.815,116.84
NetC129_1 on Bottom Layer "129_1" (solid, pour order 46): 260.604,135.001 260.604,118.11 294.894,118.11 294.894,134.874
VS7 on Bottom Layer "VS7" (solid, pour order 37): 183.931,74.676 183.769,74.514 183.769,64.516 181.356,64.516 181.356,55.245 211.074,55.245 211.074,74.676
NetC129_2 on Bottom Layer "NETC129_2_L06_P020" (solid, pour order 20): 62.23,98.933 53.975,98.933 53.975,80.899 54.229,80.645 61.341,80.645 61.341,26.543 74.549,26.543 74.549,81.534 74.93,81.915 87.376,81.915 87.376,62.611 87.884,62.103 94.869,62.103 94.869,96.139 94.234,96.774 87.122,96.774 87.122,91.948 74.803,91.948 74.803,88.773 74.93,88.646 74.422,88.138 62.357,88.138
VS3 on Bottom Layer "VS3_L06_P019" (solid, pour order 19): 99.949,74.93 99.949,70.104 99.822,69.977 96.012,69.977 96.012,55.372 125.222,55.372 125.222,75.184
VS2 on Bottom Layer "VS2_L06_P018" (solid, pour order 18): 99.949,95.885 99.949,90.297 95.758,90.297 95.758,76.835 127.508,76.835 127.508,96.012
NetC129_1 on Bottom Layer "NETC129_1_L06_P008" (solid, pour order 8): 91.567,118.872 126.873,118.872 126.873,133.985 126.746,134.112 91.44,134.112
VS1 on Bottom Layer "VS1_L06_P006" (solid, pour order 6): 99.949,117.348 99.949,111.887 95.504,111.887 95.504,97.536 127.127,97.536 127.127,117.348
VS11 on Bottom Paste "VS11" (solid): 266.827,75.692 266.827,64.516 264.541,64.516 264.541,55.499 291.719,55.499 291.719,75.692
VS10 on Bottom Paste "VS10" (solid): 266.827,96.393 266.827,85.471 264.16,85.471 264.16,76.454 292.1,76.454 292.1,96.393
VS9 on Bottom Paste "VS9" (solid): 266.7,116.967 266.7,106.553 264.795,106.553 264.795,97.409 297.815,97.409 297.815,116.84
NetC129_1 on Bottom Paste "129_1" (solid): 260.604,135.001 260.604,118.11 294.894,118.11 294.894,134.874
VS7 on Bottom Paste "VS7" (solid): 183.896,74.676 183.896,64.643 183.769,64.516 181.356,64.516 181.356,55.245 211.074,55.245 211.074,74.803
VS6 on Bottom Paste "VS6" (solid): 183.896,95.631 183.769,95.504 183.769,85.598 181.61,85.598 181.61,75.438 210.947,75.438 210.947,95.758
VS5 on Bottom Paste "VS5" (solid): 183.9,117.221 208.534,117.221 208.534,112.649 183.769,112.649
VS5 on Bottom Paste "VS5" (solid): 183.769,116.967 183.769,112.649 208.534,112.649 208.534,97.409 180.34,97.409 180.34,112.649 204.089,112.649 208.534,117.094 208.534,112.649
NetC129_1 on Bottom Paste "NetC129_1" (solid): 176.149,133.604 176.149,118.618 208.28,118.618 208.28,133.604
VS3 on Bottom Paste (solid): 99.949,74.93 99.949,69.977 96.012,69.977 96.012,55.372 125.222,55.372 125.222,75.184
VS2 on Bottom Paste (solid): 99.949,95.885 99.949,90.297 95.758,90.297 95.631,90.17 95.631,76.835 127.635,76.835 127.889,76.581 127.889,96.139
NetC129_1 on Bottom Paste (solid): 91.567,118.872 127,118.872 127,134.112 91.567,134.112
VS1 on Bottom Paste (solid): 99.949,117.348 99.949,111.887 95.377,111.887 95.377,97.663 95.504,97.536 127.127,97.536 127.127,117.348
VS11 on Bottom Solder "VS11" (solid): 266.827,75.692 266.827,64.516 264.541,64.516 264.541,55.499 291.719,55.499 291.719,75.692
VS10 on Bottom Solder "VS10" (solid): 266.827,96.393 266.827,85.471 266.7,85.344 264.16,85.344 264.16,76.581 264.287,76.454 292.1,76.454 292.1,96.266 291.973,96.393
VS9 on Bottom Solder "VS9" (solid): 266.7,116.967 266.7,106.553 264.795,106.553 264.795,97.409 297.815,97.409 297.815,116.84
NetC129_1 on Bottom Solder "129_1" (solid): 260.604,135.001 260.604,118.11 294.894,118.11 294.894,135.001
VS7 on Bottom Solder "VS7" (solid): 183.769,74.676 183.769,64.516 181.356,64.516 181.356,55.245 211.074,55.245 211.074,74.803
VS6 on Bottom Solder "VS6" (solid): 183.769,95.693 183.769,85.725 181.61,85.725 181.61,75.438 211.073,75.438 211.201,95.885
VS5 on Bottom Solder "VS5" (solid): 183.896,117.221 183.769,117.094 183.769,112.649 180.34,112.649 180.34,97.409 208.534,97.409 208.534,117.221
NetC129_1 on Bottom Solder "NetC129_1" (solid): 176.149,133.604 176.149,118.618 208.28,118.618 208.28,133.731
VS3 on Bottom Solder "VS3" (solid): 99.949,74.93 100.076,74.803 100.076,69.977 96.012,69.977 96.012,61.468 89.916,61.468 89.916,55.372 125.222,55.372 125.222,75.184
VS2 on Bottom Solder "VS2" (solid): 100.047,95.793 100.047,90.395 99.949,90.297 95.631,90.297 95.631,76.835 129.921,76.835 129.921,96.012
VS1 on Bottom Solder "VS1" (solid): 99.949,117.348 99.949,112.014 95.504,112.014 95.504,97.536 127.127,97.536 127.127,117.348
no net on Bottom Solder "VS5" (solid): 91.44,134.62 126.492,134.62 127,134.112 126.873,133.985 126.873,119.126 91.694,119.126 91.44,118.872
GND on Reg_10_GND "NONET_L-01_P-001" (solid, pour order 83): 36.068,110.871 41.783,110.871 41.91,110.998 50.419,110.998 67.564,128.143 67.564,175.895 266.319,175.895 266.319,180.213 48.26,180.213 48.26,128.524 35.941,116.205 36.068,116.078
NetC105_1 on Reg_10_GND "NONET_L-01_P-001" (solid, pour order 81): 310.769,51.816 124.714,51.816 124.714,38.354 310.769,38.354
GND on Reg_10_GND "NONET_L-01_P-001" (solid, pour order 80): 73.66,53.482 85.598,53.482 85.598,147.784 159.766,147.721 159.766,53.161 169.545,53.161 169.545,147.781 241.989,147.721 241.989,53.482 252.148,53.453 252.148,147.641 317.831,147.784 317.831,82.677 327.152,82.677 327.152,153.184 317.831,153.184 317.831,174.752 73.66,174.752
+10 on Reg_10_Pos "NONET_L-01_P-001" (solid, pour order 78): 146.368,181.737 146.368,169.799 73.215,169.799 67.564,169.799 67.564,128.397 56.07,128.397 56.07,38.735 154.242,38.735 154.242,71.374 156.909,71.374 156.909,38.735 234.018,38.608 234.018,66.805 238.125,66.805 238.125,38.735 313.312,38.735 313.312,66.805 318.198,66.805 318.198,38.735 318.198,26.924 42.989,26.924 42.989,181.737
NetC406_2 on Pulse_Neg (split plane): 319.087,171.574 319.089,171.549 319.095,171.474 319.118,171.377 319.156,171.285 319.209,171.199 319.274,171.123 319.35,171.058 319.435,171.006 319.527,170.968 319.625,170.945 319.699,170.939 319.724,170.936 328.087,170.936 328.087,37.245 319.705,37.245 319.68,37.242 319.605,37.237 319.508,37.213 319.416,37.175 319.33,37.123 319.254,37.058 319.189,36.982 319.137,36.896 319.099,36.804 319.075,36.707 319.07,36.632 319.067,36.607 319.067,25.737 35.268,25.737 35.268,36.599 35.266,36.624 35.26,36.699 35.237,36.796 35.198,36.888 35.146,36.973 35.081,37.05 35.005,37.114 34.92,37.167 34.828,37.205 34.73,37.228 34.655,37.234 34.631,37.237 26.262,37.237 26.262,170.936 34.624,170.936 34.649,170.939 34.724,170.945 34.821,170.968 34.914,171.006 34.999,171.058 35.075,171.123 35.14,171.199 35.192,171.285 35.231,171.377 35.254,171.474 35.26,171.549 35.262,171.574 35.262,182.436 319.087,182.436
HN on Pulse_Pos (split plane): 319.087,171.574 319.089,171.549 319.095,171.474 319.118,171.377 319.156,171.285 319.209,171.199 319.274,171.123 319.35,171.058 319.435,171.006 319.527,170.968 319.625,170.945 319.699,170.939 319.724,170.936 328.087,170.936 328.087,37.245 319.705,37.245 319.68,37.242 319.605,37.237 319.508,37.213 319.416,37.175 319.33,37.123 319.254,37.058 319.189,36.982 319.137,36.896 319.099,36.804 319.075,36.707 319.07,36.632 319.067,36.607 319.067,25.737 35.268,25.737 35.268,36.599 35.266,36.624 35.26,36.699 35.237,36.796 35.198,36.888 35.146,36.973 35.081,37.05 35.005,37.114 34.92,37.167 34.828,37.205 34.73,37.228 34.655,37.234 34.631,37.237 26.262,37.237 26.262,170.936 34.624,170.936 34.649,170.939 34.724,170.945 34.821,170.968 34.914,171.006 34.999,171.058 35.075,171.123 35.14,171.199 35.192,171.285 35.231,171.377 35.254,171.474 35.26,171.549 35.262,171.574 35.262,182.436 319.087,182.436

## Silkscreen, mask and mechanical layers (free items; w line width, h text height)
Top Overlay:
  lines w0.15: 34.627,25.102 34.646,25.121
  text "MOSI" at 203.304,177.546 h2.03 r90
  text "MISO" at 195.557,177.419 h2.03 r90
  text "SCK" at 198.097,177.419 h2.03 r90
  text "NCS" at 200.637,177.419 h2.03 r90
  text "+3V3" at 193.017,177.292 h2.03 r90
  text "GND" at 203.431,163.83 h2.03 r90
  text "SICHENG LI" at 194.056,160.782 h1.27
  text "ZIXING CAI" at 194.183,158.115 h1.27
  text "Neutral Point Clamped" at 43.307,29.743 h1.52
Mechanical 1:
  lines w0.15: 25.624,36.605 25.624,171.574 ; 319.697,25.099 34.631,25.099 ; 328.722,36.607 319.705,36.607 ; 328.724,36.605 328.724,171.574 319.724,171.574 ; 25.624,171.574 34.624,171.574 ; 25.624,171.574 34.624,171.574 ; 34.624,171.574 34.624,183.074 ; 34.624,171.574 34.624,183.074 ; 34.624,183.074 319.724,183.074 ; 34.631,25.099 34.631,36.599 ; 34.631,25.099 34.631,36.599 ; 34.631,36.599 25.631,36.599 34.631,36.599 ; 319.705,36.607 319.705,25.107 319.705,36.607 ; 319.724,171.574 319.724,183.074 ; 319.724,171.574 319.724,183.074

## Text inside footprints (layer, text, board x,y; h text height)
P106: Top Overlay "1" at 176.606,170.561 h1.52; Top Overlay "2" at 176.276,173.152 h1.52